# Altium PCB interface.PcbDoc
Units mm, origin at the board's own origin, x right, y up, seen from the top; angles counter-clockwise.
Board outline 31.2 x 25 mm, 2 copper layers (Top, Bottom), stack 1.569 mm thick; 9 components, 4 nets, 14 pads, 6 vias.
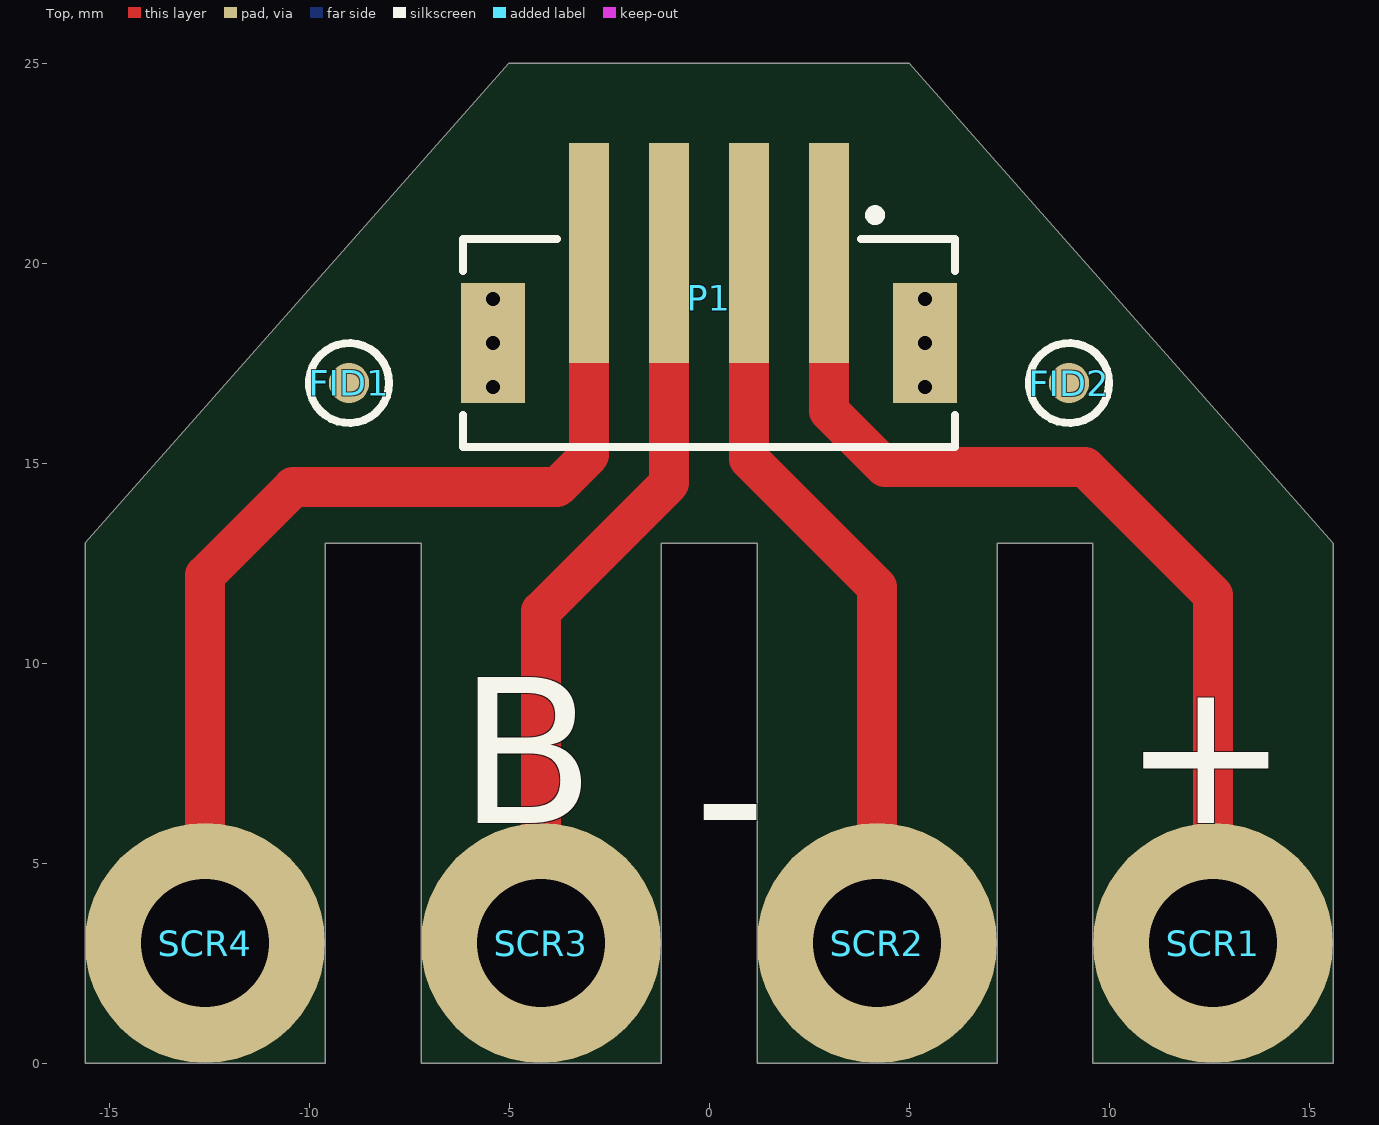
[diagram p0: Top view]
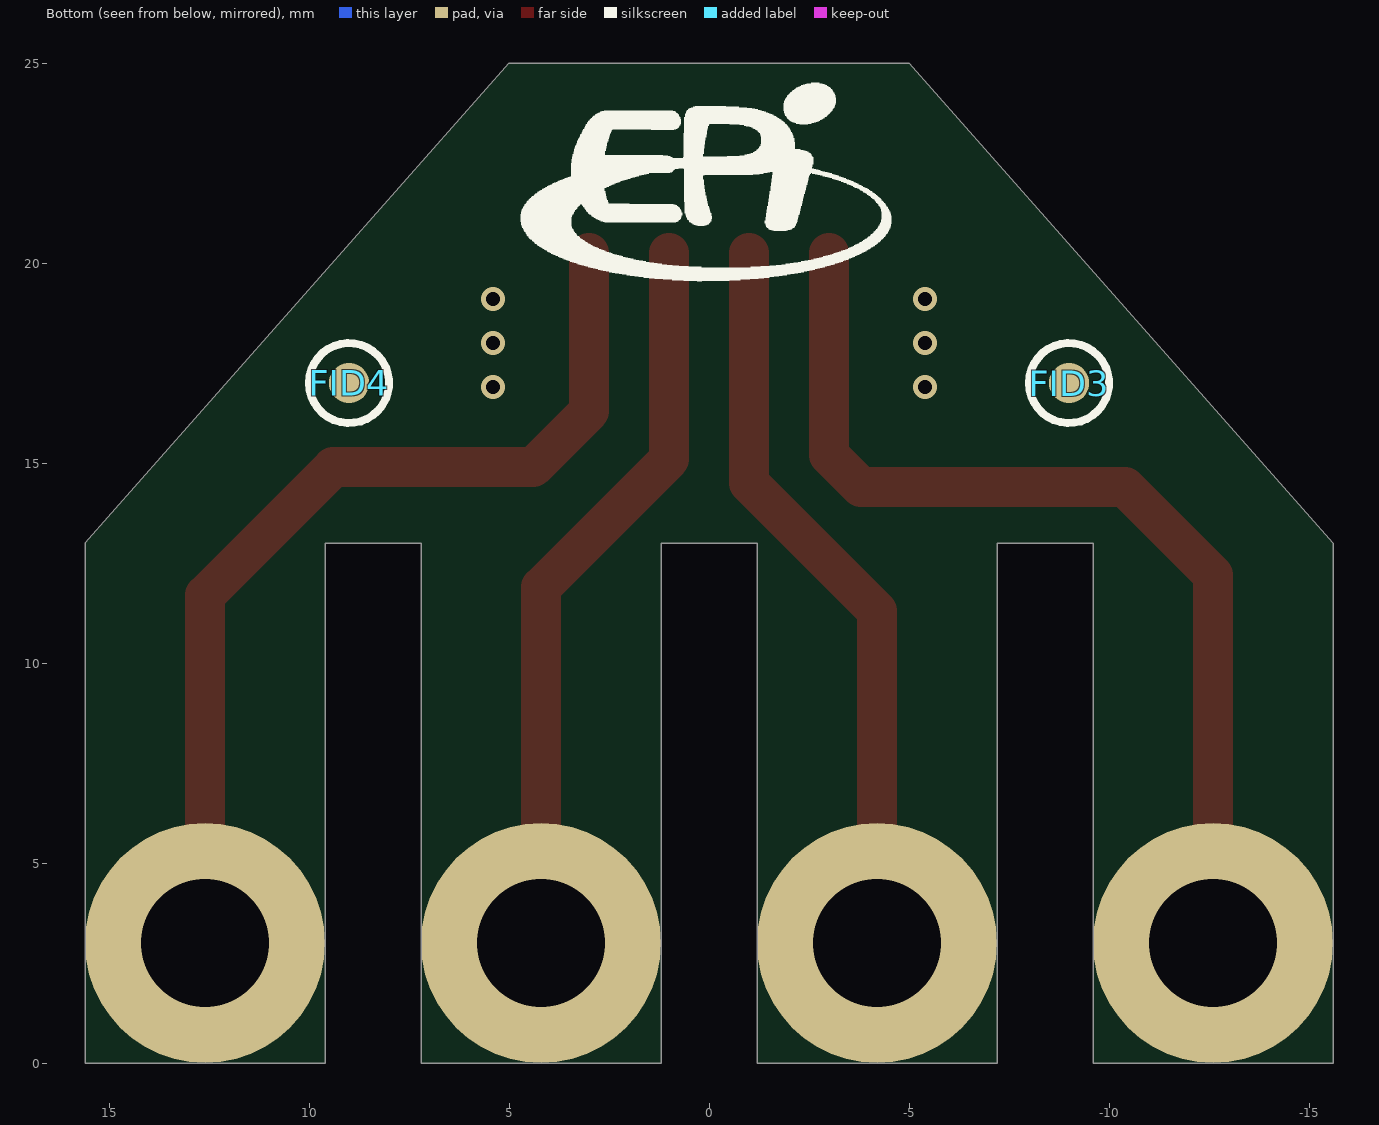
[diagram p1: Bottom view, seen from below]

## Layer stack, top to bottom
Top Solder: solder mask 0.0254, SM-001, Dk 4
Top: signal copper 0.035
Dielectric 1: core 1.4986, Core-043, Dk 4.3
Bottom: signal copper 0.035
Bottom Solder: solder mask 0.0254, SM-001, Dk 4

## Board outline
-15.6,0 -9.6,0 -9.6,13 -7.2,13 -7.2,0 -1.2,0 -1.2,13 1.2,13 1.2,0 7.2,0 7.2,13 9.596,13 9.596,0 15.6,0 15.6,13 5,25 -5,25 -15.6,13

## Design rules (kind name [scope] priority, off if disabled: settings)
BoardOutlineClearance [All] p1: gap=0.4 ignorepadtopadclearanceinfootprint=FALSE except(0: Arc-SplitContinuation Track-SplitContinuation SMDPad-SplitContinuation THPad-SplitContinuation Via-SplitContinuation Fill-SplitContinuation Poly-SplitContinuation Region-SplitContinuation Text-SplitContinuation)
Clearance [InComponent('ANT1')] p1: gap=2.5 ignorepadtopadclearanceinfootprint=FALSE
Clearance Clearance-Polygon_RF [InNetClass('RF') and (InNet('GND') or InNet('VCC') or InNet('USB_P') or InNet('USB_N'))] p2: gap=0.35 ignorepadtopadclearanceinfootprint=TRUE
Clearance Clearance-Polygon_Manual [InNetClass('manual_solder')] p3: gap=0.5 ignorepadtopadclearanceinfootprint=TRUE
Clearance Clearance-Polygon [InPolygon] p4: gap=0.15 ignorepadtopadclearanceinfootprint=TRUE
Clearance Clearance-xPP-xTP-xTT [All] p5: gap=0.15 ignorepadtopadclearanceinfootprint=FALSE
DiffPairsRouting [All] p1: maxlimit=0.25 minlimit=0.25 mostfreqgap=0.25 toplayer_minwidth=0.381 toplayer_maxwidth=0.381 toplayer_prefwidth=0.381 bottomlayer_minwidth=0.381 bottomlayer_maxwidth=0.381 bottomlayer_prefwidth=0.381 maxuncoupledlength=12.5
HoleSize [All] p1: absolutevalues=TRUE maxlimit=10 minlimit=0.025 maxpercent=80.000 minpercent=20.000
MinimumSolderMaskSliver [All] p1: minsoldermaskwidth=0.12
PasteMaskExpansion PasteMaskExpansion_TP [HasFootprint('TP_TEST_20R')] p1: expansion=-2.5
PasteMaskExpansion PasteMaskExpansion_FID [HasFootprint('FIDUCIAL-1MM')] p2: expansion=-2.5
PasteMaskExpansion [All] p3: expansion=0
PlaneClearance PlaneClearance-IPI [All] p1: clearance=0.25
PlaneConnect [All] p1: planeconnectstyle=Direct reliefexpansion=0.175 reliefentries=4 reliefconductorwidth=0.2 reliefairgap=0.2
PolygonConnect PolygonConnect-via-GND [InNet('GND') vs IsVia] p1: connectstyle=Direct reliefconductorwidth=0.3 reliefentries=4 polygonreliefangle="90 Angle" airgapwidth=0.3
PolygonConnect PolygonConnect-Module-GND [InComponent('U2')] p2: connectstyle=Direct reliefconductorwidth=0.3 reliefentries=4 polygonreliefangle="90 Angle" airgapwidth=0.3
PolygonConnect [All] p3: connectstyle=Relief reliefconductorwidth=0.254 reliefentries=4 polygonreliefangle="90 Angle" airgapwidth=0.254
RoomDefinition uc [InComponentClass('uc')] p1: confinementstyle=ConfineIn formatcopy=TRUE lockcomponents=FALSE outline 34.4,-24 107.4,-24 107.4,-9 34.4,-9
RoomDefinition meca [InComponentClass('meca')] p2: confinementstyle=ConfineIn formatcopy=TRUE lockcomponents=FALSE outline 34.4,-33 96.4,-33 96.4,-22 34.4,-22
RoutingCorners [All] p1: cornerstyle=45-Degree minsetback=2.5 maxsetback=2.5
RoutingVias "RoutingVias > 0.45mm" [(ObjectKind = 'Via') And (HoleDiameter > AsMM(0.45))] p1: holewidth=0.5 width=0.85 viastyle="Through Hole" minholewidth=0.5 minwidth=0.85 maxholewidth=0.9 maxwidth=1.25 useviatemplates=TRUE viatemplateguid#1={D917CB03-A7C4-4786-85F2-961546914ABE} viatemplatename#1=v70h35m0mx0_2554902670 // finishet hole size > 0.45mm
RoutingVias "RoutingVias <= 0.45mm" [(ObjectKind = 'Via') And (HoleDiameter <= AsMM(0.45))] p2: holewidth=0.3 width=0.65 viastyle="Through Hole" minholewidth=0.25 minwidth=0.6 maxholewidth=0.45 maxwidth=0.8 useviatemplates=TRUE viatemplateguid#1={D917CB03-A7C4-4786-85F2-961546914ABE} viatemplatename#1=v70h35m0mx0_2554902670 // finishet hole size <= 0.45mm
SilkToSolderMaskClearance [IsPad] p1: minsilkscreentomaskgap=0.15 clearancetoexposedcopper=TRUE
SolderMaskExpansion [All] p1: expansion=0 istentingtop=FALSE
UnRoutedNet [All] p1: checkbadconnections=TRUE
Width Width-xTW [All] p1: maxlimit=5 minlimit=0.15 preferedwidth=0.2
21 further rules are at their usual default settings.

## Classes and differential pairs
component class meca: FID1 FID2 FID3 FID4
component class uc: P1 SCR1 SCR2 SCR3 SCR4

## Components (designator, comment, footprint, x,y, rotation, side; value= is the part's Value field where it differs from the comment)
FID1 "FIDUCIALROUND-1MM" FID-1MM_V3 -9,17 r90 top
FID2 "FIDUCIALROUND-1MM" FID-1MM_V3 9,17 r90 top
FID3 "FIDUCIALROUND-1MM" FID-1MM_V3 -9,17 r90 bottom
FID4 "FIDUCIALROUND-1MM" FID-1MM_V3 9,17 r90 bottom
P1 "620304124022" 620304124022 0,18 r0 top
SCR1 "SCREW-PTH_M3" SCREW-TCHC-M3-PTH 12.6,3 r0 top
SCR2 "SCREW-PTH_M3" SCREW-TCHC-M3-PTH 4.2,3 r0 top
SCR3 "SCREW-PTH_M3" SCREW-TCHC-M3-PTH -4.2,3 r0 top
SCR4 "SCREW-PTH_M3" SCREW-TCHC-M3-PTH -12.6,3 r0 top

## Footprints (in the part's own frame and the unit in brackets; to place one, negate y for a bottom-side part, rotate by r counter-clockwise, add the part's x,y. Pads: shape width x height; smd on the part's side, far side on the other; paste and mask are expansions set on the pad)
620304124022 [mm] "2.00mm SMT Male Vertical Shrouded Header, 4p"
  rect 1x5.5 smd: 1(3,2.25) 2(1,2.25) 3(-1,2.25) 4(-3,2.25)
  rect 1.6x3 smd: MP1(-5.4,0) MP2(5.4,0)
  silkscreen extent -6.15,-2.6 6.15,3.32, body extent -6,-2.5 6,4.51, height 6.77
FID-1MM_V3 [mm]
  round 1 smd paste-2 mask+0.3: 1(0,0)
  silkscreen extent -1,-1 1,1
SCREW-TCHC-M3-PTH [mm]
  round 6 / inner round 1.524 / far side round 6 hole 3.2: 1(0,0)

## Part data
FID1 FID2 FID3 FID4: CASE=??, Package=FIDUCIAL-1MM, DeviceName=ROUND-1MM, DeviceSetName=FIDUCIAL, ENO_PN=LOC0001, GateName_1=G$1, INFO="no mounted", LibraryName=marker-eno, MPN=??, SymbolName_1=FIDUCIAL
P1: library part CMP-1502-00662-2, Color="Beige, White", Contact Resistance=20mΩ, Current Rating=2A, Flammability Rating="UL94 V-0", Insulation Resistance=1GΩ, Max Operating Temperature=85°C, Min Operating Temperature=-40°C, Operating Supply Voltage=100V, Voltage Rating=125V, Connector Type="Male Pin", Contact Gender=Male, Contact Material=Copper, Contact Mating Length=3.5052mm, Contact Plating=Tin, Gender=Male, Height=6.6mm, Housing Material=Nylon, Insulation=Insulated, Lead Free="Lead Free", Lead Pitch=2mm, Length=9mm, Mount="Surface Mount", NexarPartId=18818244, Number of Contacts=4, Number of Pins=4, Number of Positions=4, Number of Rows=1, Orientation=Vertical, Packaging="Tape and Reel", Pitch=2mm, REACH SVHC=Unknown, RoHS=Compliant, Termination=SMD/SMT, Width=11.9mm
SCR1 SCR2 SCR3 SCR4: 3DPACKAGE=NO, Package=SCREW-TCHC-M3-PTH, DeviceName=M3, DeviceSetName=SCREW-PTH_, ENO_PN=SCR0001, GateName_1=G$1, INFO="Standard CHC M3", LibraryName=screw-eno, MF=GENERIC, SymbolName_1=SCREW

## Via types
v1: diameter 0.6, hole 0.35, Top to Bottom, tented both sides, 6 vias

## Nets (pads, with @x,y where several pads share a name; then routed paths per layer and width w, separated by ;. In a path a pad name is that pad's centre, name@x,y a point inside that pad or via, vN(x,y) a via of type N, cw(c..) or ccw(c..) an arc to the next point about the centre after c; other vN are vias at no path point)
+3V3: P1.1 SCR1.1 | length 24.2
  Top w1: P1.1 3,16.3 4.4,14.9 9.4,14.9 12.6,11.7 SCR1.1
NetP1_2: P1.2 SCR2.1 | length 18.6
  Top w1: P1.2 1,15.1 4.2,11.9 SCR2.1
Wheel1_A: P1.4 SCR4.1 | length 25.1
  Top w1: SCR4.1 -12.6,12.2 -10.4,14.4 -3.8,14.4 -3,15.2 P1.4
Wheel1_B: P1.3 SCR3.1 | length 18.6
  Top w1: SCR3.1 -4.2,11.3 -1,14.5 P1.3
pads on no net: FID1.1 FID2.1 FID3.1 FID4.1 P1.MP1 P1.MP2
copper on no net:
  other v1: -5.4,16.9 5.4,16.9 -5.4,18 5.4,18 -5.4,19.1 5.4,19.1

## Silkscreen, mask and mechanical layers (free items; w line width, h text height)
Top Overlay:
  text "A" at -20.048,6.001 h5
  text "B" at -6.266,6.001 h5
  text "+" at 10.334,6.001 h5
  text "-" at -0.365,4.901 h5
Bottom Overlay:
  drawing of 2 lines, arcs and shapes, not listed